# Altium PCB ice.PcbDoc (part 1 of 2)
Units mm, origin at the board's own origin, x right, y up, seen from the top; angles counter-clockwise.
Board outline 65 x 30 mm, 4 copper layers (L1 [TOP], L2 [GND], L3[PWR], L4 [BOTTOM]), stack 1.49 mm thick; 140 components, 110 nets, 478 pads, 226 vias.
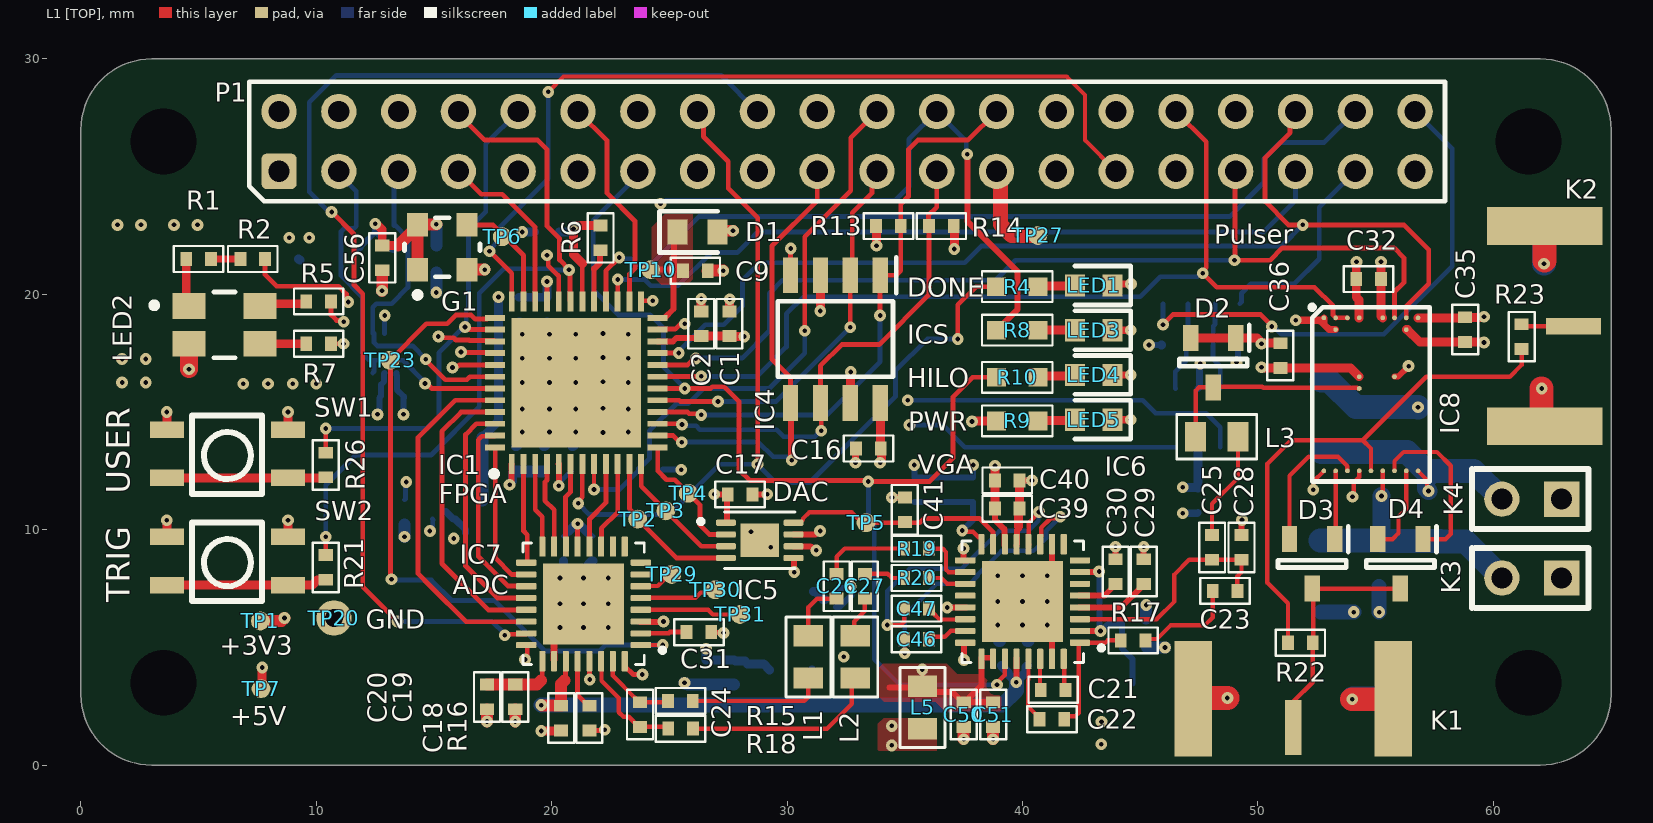
[diagram p0: L1 [TOP] view]
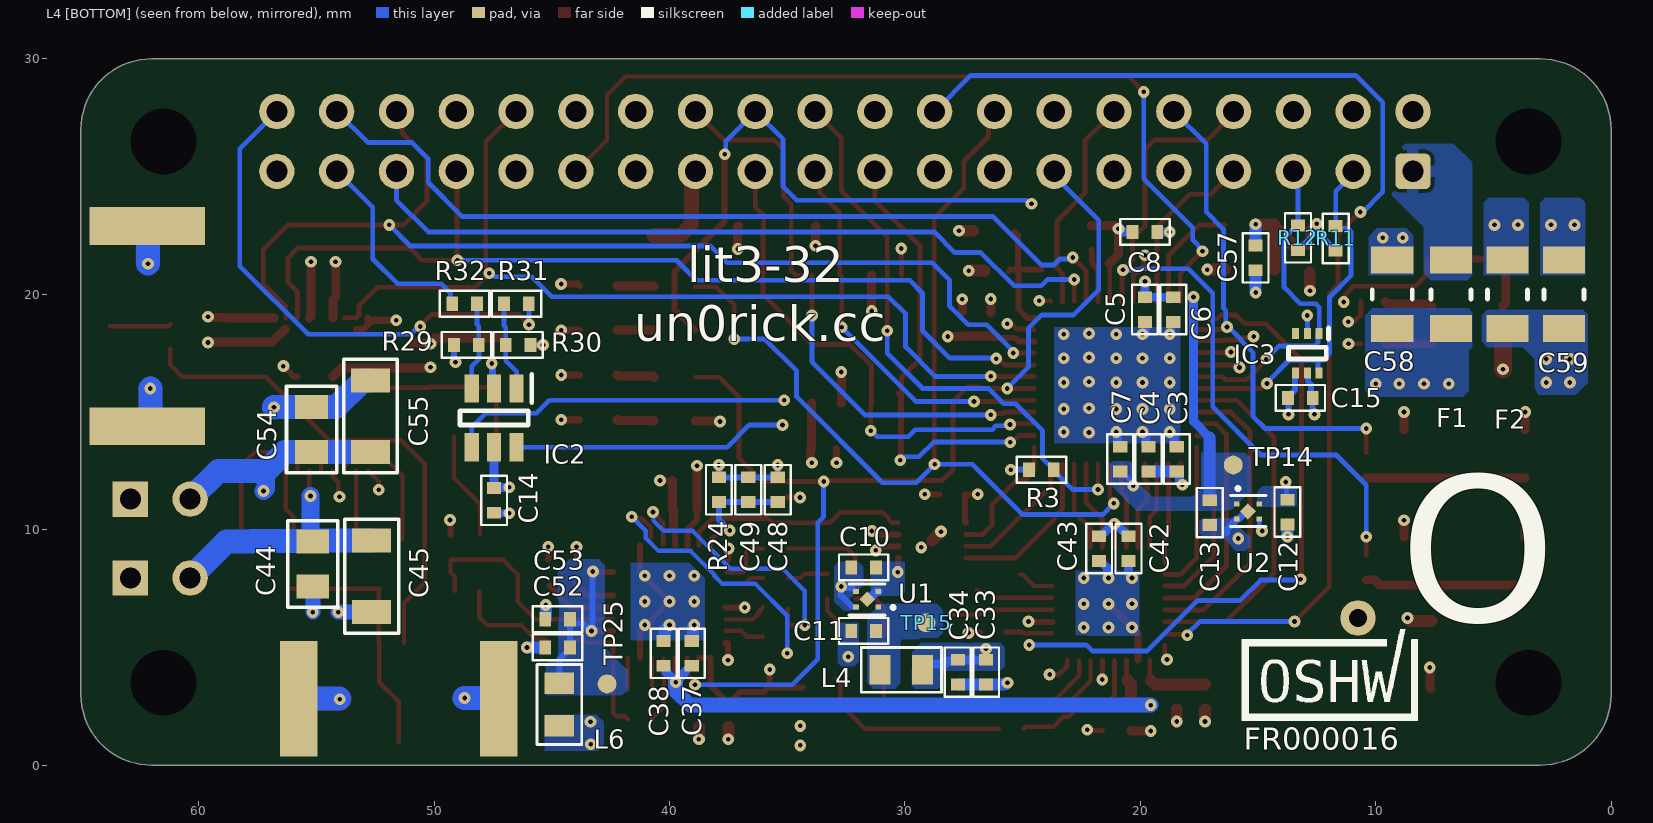
[diagram p1: L4 [BOTTOM] view, seen from below]
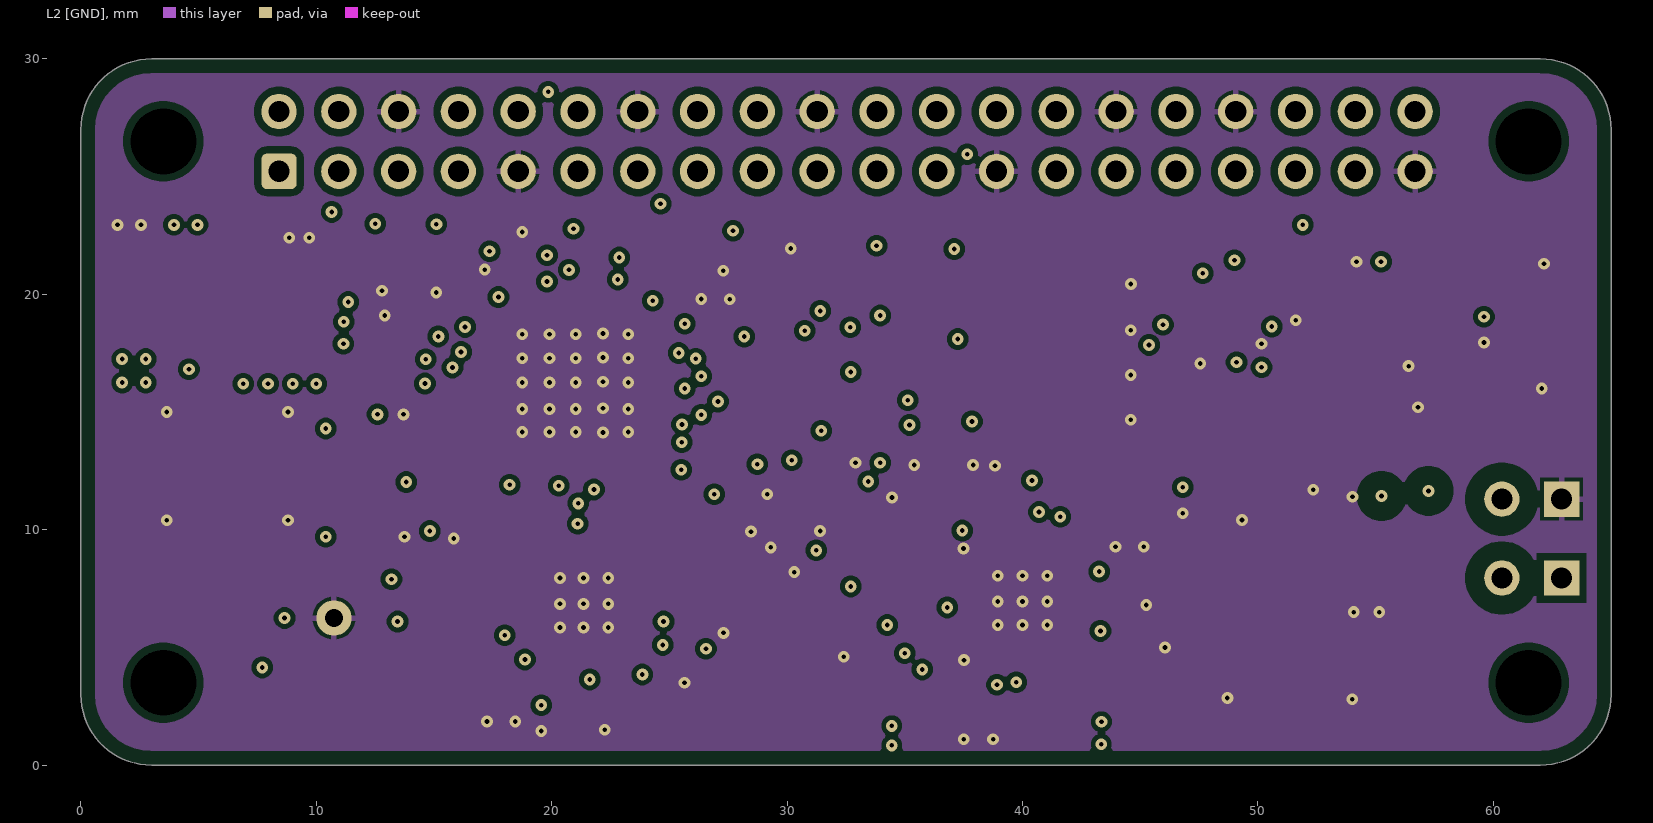
[diagram p2: L2 [GND]]
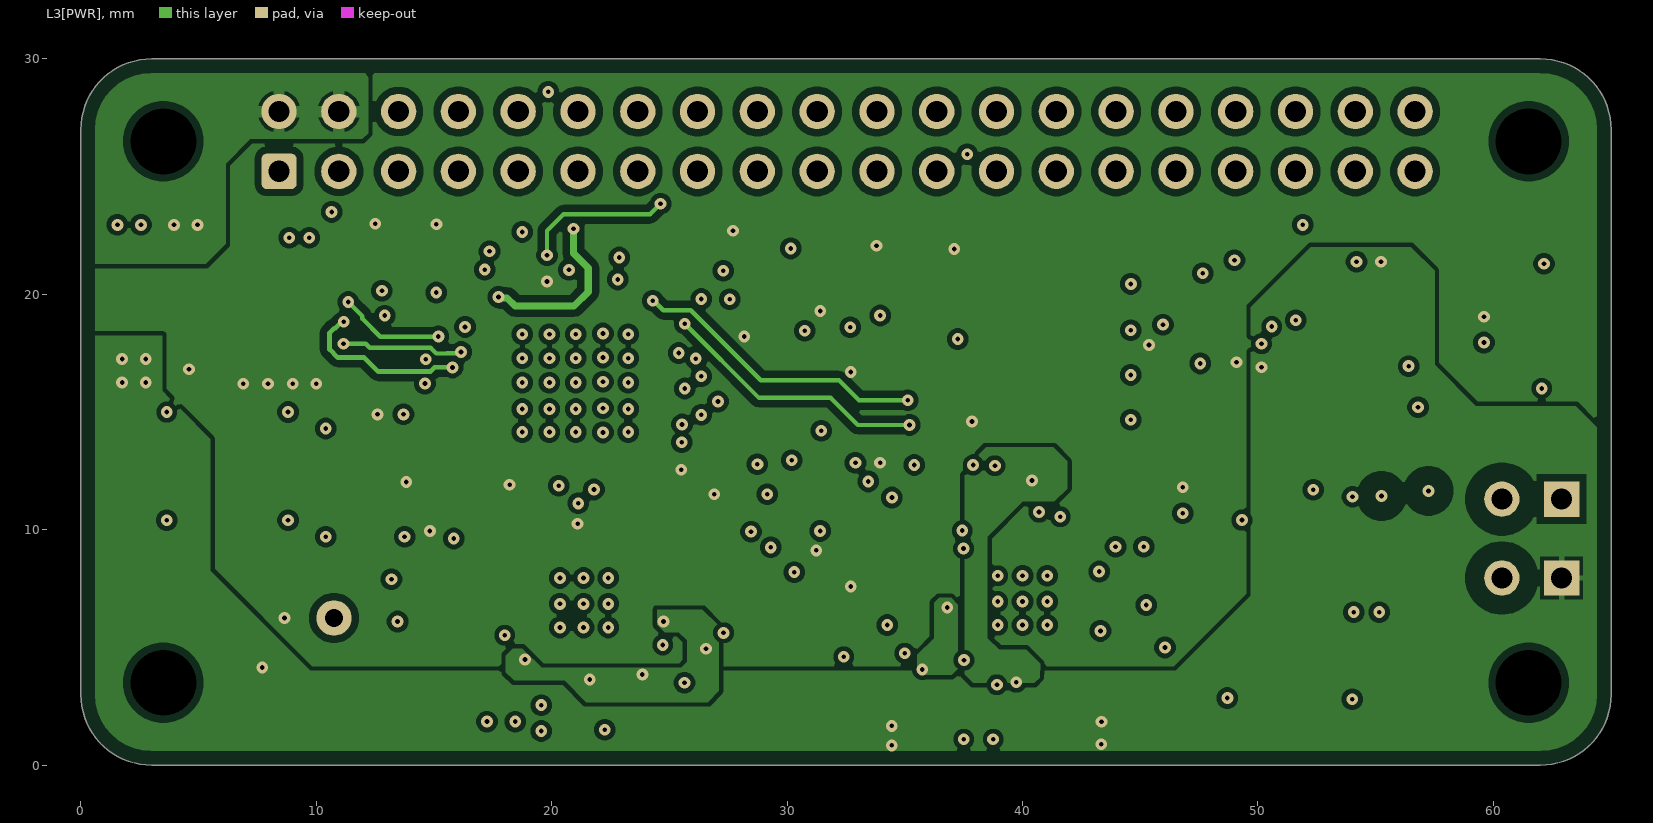
[diagram p3: L3[PWR]]
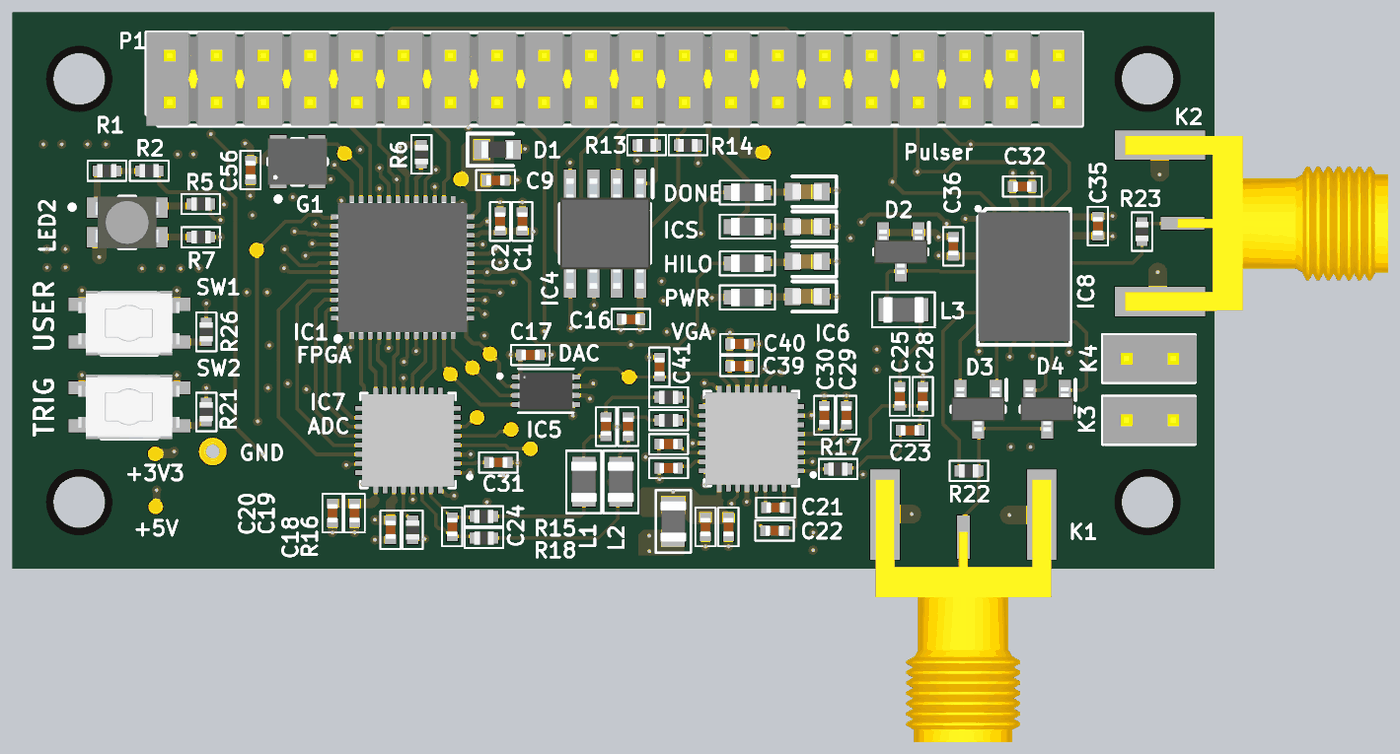
[diagram p5: 3D render of the assembled board from above, using the file's embedded part models]
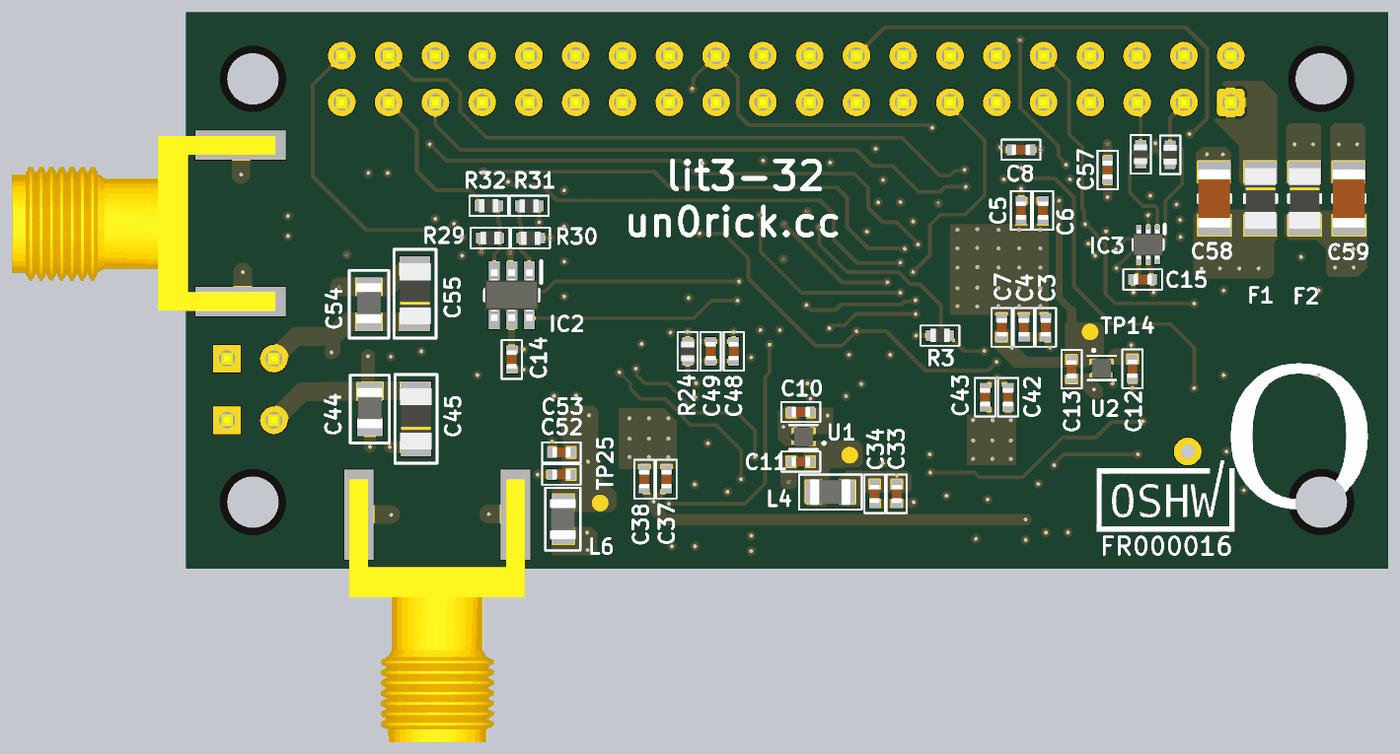
[diagram p6: 3D render of the assembled board from below, using the file's embedded part models]

## Layer stack, top to bottom
Top Solder: solder mask 0.0102, Solder Resist, Dk 3.5
L1 [TOP]: signal copper 0.035
Dielectric 2: prepreg 0.11, PP-018, Dk 4.29
L2 [GND]: signal copper 0.035
Dielectric 1: dielectric 1.13, FR-4, Dk 3.96
L3[PWR]: signal copper 0.035
Dielectric 3: prepreg 0.11, PP-018, Dk 4.29
L4 [BOTTOM]: signal copper 0.035
Bottom Solder: solder mask 0.0102, Solder Resist, Dk 3.5

## Board outline
0,3 0,27 cw(c3,27) 3,30 62,30 cw(c62,27) 65,27 65,3 cw(c62,3) 62,0 3,0 cw(c3,3)

## Design rules (kind name [scope] priority, off if disabled: settings)
BoardOutlineClearance [All] p1: gap=0.2 ignorepadtopadclearanceinfootprint=FALSE except(0.6: Poly-OutlineEdge)
Clearance Clearance_HV [InNet('+HV', '-HV')] p1: gap=0.6 ignorepadtopadclearanceinfootprint=TRUE
Clearance "Clearance Polygons" [InPolygon] p2: gap=0 ignorepadtopadclearanceinfootprint=FALSE except(0.2: Via-Fill Via-Poly Via-Region Fill-Fill Fill-Poly Fill-Region Poly-Poly Poly-Region Region-Region; 0.3: Arc-Fill Arc-Poly Arc-Region Track-Fill Track-Poly Track-Region SMDPad-Fill SMDPad-Poly SMDPad-Region THPad-Fill THPad-Poly THPad-Region)
Clearance [All] p3: gap=0.254 ignorepadtopadclearanceinfootprint=FALSE except(0.15: Arc-Text Track-Text SMDPad-Text THPad-Text Via-Text Fill-Text Poly-Text Region-Text Text-Text; 0.152: Arc-Arc Arc-Track Arc-SMDPad Arc-Via Track-Track Track-SMDPad Track-Via SMDPad-SMDPad SMDPad-Via; 0.2: Via-Fill Via-Poly Via-Region Fill-Fill Fill-Poly Fill-Region Poly-Poly Poly-Region Region-Region; 0.54: THPad-THPad)
ComponentClearance "HM-TRP & UFL" [InComponent('X1') vs InComponent('U1')] p1: gap=0 collisioncheckmode=3 verticalgap=0 showdistances=FALSE
ComponentClearance [All] p2: gap=0.025 collisioncheckmode=3 verticalgap=0.025 showdistances=FALSE
Height [All] p1: minheight=0 maxheight=60 prefheight=12.7
HoleSize [All] p1: absolutevalues=TRUE maxlimit=6.3 minlimit=0.2 maxpercent=80.000 minpercent=20.000
HoleToHoleClearance [All] p1: gap=0.54 allowstackedmicrovias=FALSE
MinimumAnnularRing MinimumAnnularRing_Via [IsVia] p1: minimumring=0.15
MinimumAnnularRing [All] p2: minimumring=0.3
MinimumSolderMaskSliver [All] p1: minsoldermaskwidth=0.1
PlaneClearance [All] p1: clearance=0.254
PlaneConnect [All] p1: planeconnectstyle=Relief reliefexpansion=0.102 reliefentries=4 reliefconductorwidth=0.152 reliefairgap=0.152
PolygonConnect "Via connect style" [isVia] p1: connectstyle=Direct reliefconductorwidth=0.254 reliefentries=4 polygonreliefangle="90 Angle" airgapwidth=0.254
PolygonConnect [All] p2: connectstyle=Relief reliefconductorwidth=0.254 reliefentries=4 polygonreliefangle="90 Angle" airgapwidth=0.152
RoutingCorners [All] p1: cornerstyle=45-Degree minsetback=1.25 maxsetback=1.25
RoutingVias [All] p1: holewidth=0.4 width=0.8 viastyle="Through Hole" minholewidth=0.2 minwidth=0.45 maxholewidth=2 maxwidth=4
SilkToSilkClearance [All] p1: silktosilkclearance=0
SilkToSolderMaskClearance [IsPad] p1: minsilkscreentomaskgap=0.127 clearancetoexposedcopper=TRUE
SolderMaskExpansion SolderMaskExpansion_Via [IsVia] p1: expansion=0.05 istentingtop=TRUE
SolderMaskExpansion [All] p2: expansion=0.05 istentingtop=FALSE useseparateexpansions=TRUE expansionbottom=0.05 istentingbottom=FALSE
UnRoutedNet [All] p1: checkbadconnections=TRUE
Width 50Ohm [InNetClass('50Ohm')] p1 off: maxlimit=0.185 minlimit=0.131 preferedwidth=0.185 toplayer_minwidth=0.185 midlayer1_maxwidth=0.131 midlayer1_prefwidth=0.131 midlayer2_maxwidth=0.131 midlayer2_prefwidth=0.131 bottomlayer_minwidth=0.185 impedanceprofiledriven=TRUE impedanceprofileid={AB148E26-7750-462C-8A86-80EFB9ABE8EF} impedanceprofilevalue=50.000000 minimp=50.000000 maximp=50.000000 favimp=50.000000
Width GND [InNet('GND')] p2: maxlimit=6.35 minlimit=0.127 preferedwidth=0.508
Width [All] p3: maxlimit=10.16 minlimit=0.152 preferedwidth=0.203
19 further rules are at their usual default settings.

## Classes and differential pairs
net class I2C: SCL SDA
net class PCM: PCM_CLK PCM_DIN PCM_FS
net class DAC_SPI: DAC_CS DAC_MOSI DAC_SCLK
net class FLASH_SPI: F_CS F_MISO F_MOSI F_SCLK
net class EA_CLK: EA_CLK
net class DCLK: DCLK
net class ADC_CLK: ADC_CLK
net class 50Ohm: NetC21_1 NetC21_2 NetC22_1 NetC22_2 NetC23_1 NetC23_2 NetC24_1 NetC24_2 NetC25_2 NetC26_1 NetC26_2 NetC27_1 NetC27_2 NetC46_1 NetC46_2 NetC47_1 NetC47_2 NetD2_3 NetD3_3 NetK2_1 NetL1_2 NetL2_2 VOH2 VOL2 XDCR
net class RCLK: RCLK

## Components (designator, comment, footprint, x,y, rotation, side; value= is the part's Value field where it differs from the comment)
C1 "cap0402" SM0402_3D_cap 27.55,18.75 r270 top value=100n
C2 "cap0402" SM0402_3D_cap 26.35,18.75 r270 top value=10u
C3 "cap0402" SM0402_3D_cap 18.45,13 r270 bottom value=100n
C4 "cap0402" SM0402_3D_cap 19.65,13 r270 bottom value=10u
C5 "cap0402" SM0402_3D_cap 19.8,19.35 r90 bottom value=100n
C6 "cap0402" SM0402_3D_cap 18.6,19.35 r90 bottom value=10u
C7 "cap0402" SM0402_3D_cap 20.85,13 r270 bottom value=100n
C8 "cap0402" SM0402_3D_cap 19.8,22.65 r0 bottom value=100n
C9 "cap0402" SM0402_3D_cap 26.1,21 r180 top value=100n
C10 "cap0402" SM0402_3D_cap 31.75,8.4 r0 bottom value=100n
C11 "cap0402" SM0402_3D_cap 31.75,5.7 r180 bottom value=1u
C12 "cap0402" SM0402_3D_cap 13.75,10.75 r90 bottom value=100n
C13 "cap0402" SM0402_3D_cap 17.05,10.725 r90 bottom value=1u
C14 "cap0402" SM0402_3D_cap 47.45,11.25 r90 bottom value=100n
C15 "cap0402" SM0402_3D_cap 13.2,15.6 r0 bottom value=100n
C16 "cap0402" SM0402_3D_cap 33.45,13.45 r180 top value=100n
C17 "cap0402" SM0402_3D_cap 28,11.5 r180 top value=100n
C18 "cap0402" SM0402_3D_cap 20.4,2 r270 top value=100n
C19 "cap0402" SM0402_3D_cap 18.45,2.9 r90 top value=100n
C20 "cap0402" SM0402_3D_cap 17.25,2.9 r90 top value=10u
C21 "cap0402" SM0402_3D_cap 41.3,3.2 r0 top value=100n
C22 "cap0402" SM0402_3D_cap 41.25,1.95 r180 top value=100n
C23 "cap0402" SM0402_3D_cap 48.6,7.4 r180 top value=18n
C24 "cap0402" SM0402_3D_cap 23.75,2.15 r90 top value=18p
C25 "cap0402" SM0402_3D_cap 48.05,9.25 r90 top value=100n
C26 "cap0402" SM0402_3D_cap 32.1,7.6 r90 top value=100n
C27 "cap0402" SM0402_3D_cap 33.3,7.6 r90 top value=100n
C28 "cap0402" SM0402_3D_cap 49.3,9.25 r90 top value=22p
C29 "cap0402" SM0402_3D_cap 45.15,8.225 r90 top value=100n
C30 "cap0402" SM0402_3D_cap 43.95,8.225 r90 top value=100n
C31 "cap0402" SM0402_3D_cap 26.25,5.65 r0 top value=100n
C32 "cap0402" SM0402_3D_cap 54.7,20.65 r180 top value=100n
C33 "cap0402" SM0402_3D_cap 26.55,3.95 r90 bottom value=100n
C34 "cap0402" SM0402_3D_cap 27.75,3.95 r90 bottom value=10u
C35 "cap0402" SM0402_3D_cap 58.8,18.5 r270 top value=100n
C36 "cap0402" SM0402_3D_cap 50.95,17.4 r270 top value=100n
C37 "cap0402" SM0402_3D_cap 39.05,4.75 r270 bottom value=100n
C38 "cap0402" SM0402_3D_cap 40.25,4.75 r270 bottom value=1n
C39 "cap0402" SM0402_3D_cap 39.349,10.895 r0 top value=100n
C40 "cap0402" SM0402_3D_cap 39.349,12.095 r0 top value=1n
C41 "cap0402" SM0402_3D_cap 35,10.85 r270 top value=1n
C42 "cap0402" SM0402_3D_cap 20.5,9.2 r90 bottom value=100n
C43 "cap0402" SM0402_3D_cap 21.75,9.2 r90 bottom value=10u
C44 "cap0805" SM0805 55.15,7.595 r90 bottom value=0.1x200V
C45 "cap1206" SM1206 52.65,6.5 r90 bottom value=0.1x200V
C46 "cap0402" SM0402_3D_cap 35.5,5.35 r0 top value=100n
C47 "cap0402" SM0402_3D_cap 35.5,6.65 r0 top value=100n
C48 "cap0402" SM0402_3D_cap 35.4,11.7 r270 bottom value=100n
C49 "cap0402" SM0402_3D_cap 36.65,11.7 r270 bottom value=1n
C50 "cap0402" SM0402_3D_cap 37.5,2.15 r90 top value=100n
C51 "cap0402" SM0402_3D_cap 38.75,2.15 r90 top value=1n
C52 "cap0402" SM0402_3D_cap 44.75,5 r180 bottom value=100n
C53 "cap0402" SM0402_3D_cap 44.75,6.2 r180 bottom value=1n
C54 "cap0805" SM0805 55.2,13.3 r90 bottom value=0.1x200V
C55 "cap1206" SM1206 52.7,13.3 r90 bottom value=0.1x200V
C56 "cap0402" SM0402_3D_cap 12.8,21.55 r90 top value=100n
C57 "cap0402" SM0402_3D_cap 15.1,21.55 r90 bottom value=10u
C58 "Capacitor" CAP_CERAMIC_1206 9.3,20 r270 bottom value=47uF
C59 "Capacitor" CAP_CERAMIC_1206 2,20 r270 bottom value=47uF
D1 "CDBU0520" DIOC1709X85N 26.2,22.65 r0 top
D2 "MMBD7000HS-7-F" SOT96P240X110-3N 48.1,17.1 r270 top
D3 "MMBD7000HS-7-F" SOT96P240X110-3N 52.3,8.55 r270 top
D4 "MMBD7000HS-7-F" SOT96P240X110-3N 56.05,8.55 r270 top
F1 "1206SFF050F/63-2" FUSE_1206 6.8,20 r270 bottom
F2 "1206SFF050F/63-2" FUSE_1206 4.4,20 r270 bottom
G1 "Oscillator" OSC_ASEM 15.35,22 r0 top
IC1 "ICE40UP5K-SG48ITR" QFN50P700X700X100-49N-D 21.05,16.25 r90 top
IC2 "SN74LVC2G17DBVR" SOT95P280X145-6N 47.45,14.75 r270 bottom
IC3 "TMP112AIDRLR" SOTFL50P160X60-6N 12.9,17.5 r270 bottom
IC4 "W25X10CLSNIG" SOIC127P600X175-8N 32.05,18.1 r270 top
IC5 "MCP4811-E/MC" SON50P200X300X100-9N 28.835,9.55 r0 top
IC6 "AD8332ACPZ-R7" QFN50P500X500X100-33N 40,6.95 r180 top
IC7 "AD9629BCPZ-65" QFN50P500X500X100-33N 21.35,6.85 r180 top
IC8 "HV7361GA-G" BGA22C50P9X14_500X700X105 54.8,15.75 r0 top
K1 "SMA_Edge" AMPHENOL_132357-11 51.5,1.25 r90 top
K2 "SMA_Edge" AMPHENOL_132357-11 63.75,18.65 r180 top
K3 "1x2PLS" JUMPER2 62.9,7.95 r270 top
K4 "1x2PLS" JUMPER2 62.9,11.3 r270 top
L1 "75R@100MHz" "SM_0805_INDUCTANCE _3D" 30.9,4.6 r270 top
L2 "75R@100MHz" "SM_0805_INDUCTANCE _3D" 32.9,4.6 r270 top
L3 "75R@100MHz" "SM_0805_INDUCTANCE _3D" 48.25,13.95 r0 top
L4 "75R@100MHz" "SM_0805_INDUCTANCE _3D" 30.15,4.05 r0 bottom
L5 "75R@100MHz" "SM_0805_INDUCTANCE _3D" 35.75,2.45 r270 top
L6 "75R@100MHz" "SM_0805_INDUCTANCE _3D" 44.675,2.575 r90 bottom
LED1 "HSMW-C191" LEDC1608X70N 43.025,20.375 r180 top
LED2 "CLVBA-FKA-CAEDH8BBB7A363" CLVBAFKACAEDH8BBB7A363 6.1,18.7 r0 top
LED3 "HSMW-C191" LEDC1608X70N 43.025,18.475 r180 top
LED4 "HSMW-C191" LEDC1608X70N 43.025,16.575 r180 top
LED5 "HSMW-C191" LEDC1608X70N 43.025,14.675 r180 top
P1 "2x20 2.54mm vertical" PLD-40 32.545,26.495 r0 top
R1 "100" SM0402_3D_res 5,21.5 r0 top value=4k7
R2 "100" SM0402_3D_res 7.3,21.5 r0 top value=4k7
R3 "10k" SM0402_3D_res 24.2,12.55 r180 bottom value=4k7
R4 "1k" SM0603_3D_res 39.775,20.325 r0 top value=4k7
R5 "100" SM0402_3D_res 10.1,19.7 r0 top value=4k7
R6 "100" SM0402_3D_res 22.075,22.4 r270 top value=4k7
R7 "100" SM0402_3D_res 10.1,17.9 r0 top value=4k7
R8 "1k" SM0603_3D_res 39.775,18.475 r0 top value=4k7
R9 "1k" SM0603_3D_res 39.775,14.625 r0 top value=4k7
R10 "1k" SM0603_3D_res 39.775,16.475 r0 top value=4k7
R11 "4k7" SM0402_3D_res 11.7,22.375 r90 bottom
R12 "4k7" SM0402_3D_res 13.3,22.4 r90 bottom
R13 "4k7" SM0402_3D_res 34.3,22.9 r180 top
R14 "4k7" SM0402_3D_res 36.55,22.9 r180 top
R15 "158" SM0402_3D_res 25.467,2.727 r180 top value=4k7
R16 "10k" SM0402_3D_res 21.6,2 r270 top value=4k7
R17 "280" SM0402_3D_res 44.7,5.3 r180 top value=4k7
R18 "158" SM0402_3D_res 25.475,1.55 r180 top value=4k7
R19 "84,5" SM0402_3D_res 35.5,9.2 r180 top value=4k7
R20 "84,5" SM0402_3D_res 35.5,7.95 r180 top value=4k7
R21 "100" SM0402_3D_res 10.4,8.4 r90 top value=4k7
R22 "0R" SM0402_3D_res 51.8,5.2 r180 top value=4k7
R23 "0R" SM0402_3D_res 61.2,18.2 r90 top value=4k7
R24 "11k" SM0402_3D_res 37.9,11.7 r270 bottom value=4k7
R26 "100" SM0402_3D_res 10.4,12.75 r90 top value=4k7
R29 "4k7" SM0402_3D_res 48.625,17.85 r180 bottom
R30 "4k7" SM0402_3D_res 46.425,17.85 r0 bottom
R31 "100" SM0402_3D_res 46.5,19.6 r0 bottom value=4k7
R32 "100" SM0402_3D_res 48.7,19.6 r180 bottom value=4k7
SW1 "EVQ-P9P02M" "Button 4.7x3.5 _SMT" 3.65,12.2 r90 top
SW2 "EVQ-P9P02M" "Button 4.7x3.5 _SMT" 3.65,7.65 r90 top
TP1 "TP80" TP80_no_silk 7.625,6.125 r0 top
TP2 "TP80" TP80_no_silk 23.65,10.45 r90 top
TP3 "TP80" TP80_no_silk 24.85,10.8 r90 top
TP4 "TP80" TP80_no_silk 25.8,11.55 r90 top
TP5 "TP80" TP80_no_silk 33.35,10.3 r90 top
TP6 "TP80" TP80_no_silk 17.9,22.45 r90 top
TP7 "TP80" TP80_no_silk 7.65,3.25 r90 top
TP10 "TP80" TP80_no_silk 24.2,21.05 r90 top
TP14 "TP80" TP80_no_silk 16.05,12.75 r270 bottom
TP15 "TP80" TP80_no_silk 29.1,6.05 r90 bottom
TP20 "TP125X75" TP125X75 10.75,6.25 r90 top
TP23 "TP80" TP80_no_silk 13.131,17.2 r90 top
TP25 "TP80" TP80_no_silk 42.65,3.45 r0 bottom
TP27 "TP80" TP80_no_silk 40.65,22.5 r90 top
TP29 "TP80" TP80_no_silk 25.1,8.1 r90 top locked
TP30 "TP80" TP80_no_silk 26.95,7.45 r90 top locked
TP31 "TP80" TP80_no_silk 28,6.4 r90 top
U1 "TLV70718PDQNR" "X2SON - 2" 31.601,7.046 r0 bottom
U2 "TLV70712PDQNR" "X2SON - 2" 15.425,10.775 r180 bottom

## Footprints (in the part's own frame and the unit in brackets; to place one, negate y for a bottom-side part, rotate by r counter-clockwise, add the part's x,y. Pads: shape width x height; smd on the part's side, far side on the other; paste and mask are expansions set on the pad)
AMPHENOL_132357-11 [mm]
  rect 2.35x0.7 smd: 1(0.35,0)
  rect 4.9x1.6 smd: 2(1.575,4.25) 2(1.575,-4.25)
  rect 4.9x1.6 smd far side: 2(1.575,4.25) 2(1.575,-4.25)
  body extent -10.8,-4.76 3.48,4.76, height 4.08
BGA22C50P9X14_500X700X105 [mm]
  round 0.2 smd: A1(-2,3.25) A2(-1.5,3.25) A3(-1,3.25) A4(-0.5,3.25) A6(0.5,3.25) A7(1,3.25) A8(1.5,3.25) A9(2,3.25) B2(-1.5,2.75) B8(1.5,2.75) F4(-0.5,0.75) F7(1,0.75) G4(-0.5,0.25) P1(-2,-3.25) P2(-1.5,-3.25) P3(-1,-3.25) P4(-0.5,-3.25) P5(0,-3.25) P6(0.5,-3.25) P7(1,-3.25) P8(1.5,-3.25) P9(2,-3.25)
  silkscreen extent -2.6,-3.7 2.5,3.8, body extent -2.5,-3.5 2.5,3.5, height 1.05
"Button 4.7x3.5 _SMT" [mm] "EVQ-P9P02M_SMT"
  rect 0.7x1.45 smd: 1(0,0) 2(0,-5.15) 3(2.05,0) 4(2.05,-5.15)
  silkscreen extent -0.67,-4.05 2.65,-1.07, body extent -0.72,-5.3 2.78,0.2, height 2.11
CAP_CERAMIC_1206 [mm]
  rect 1.15x1.8 smd mask+0.051: 1(-1.45,0) 2(1.45,0)
  silkscreen extent -0.2,-0.85 0.2,0.85, body extent -1.6,-0.9 1.6,0.9, height 1.61
CLVBAFKACAEDH8BBB7A363 [mm]
  rect 1.4x1.1 smd: 1(-1.5,0.8) 2(-1.5,-0.8) 3(1.5,0.8) 4(1.5,-0.8)
  silkscreen extent -3.11,-1.4 0.45,1.4, body extent -1.75,-1.4 1.75,1.4, height 2.06
DIOC1709X85N [mm]
  rect 0.85x1.05 smd: 1(-0.85,0) 2(0.85,0)
  silkscreen extent -1.63,-0.87 0.85,0.87, body extent -0.85,-0.45 0.85,0.45, height 0.85
FUSE_1206 [mm] "FUSE, 2-Leads, Body 3.2x1.60mm, IPC Medium Density"
  rect 1.15x1.8 smd mask+0.051: 1(-1.45,0) 2(1.45,0)
  silkscreen extent -0.2,-0.85 0.2,0.85, body extent -1.65,-0.85 1.65,0.85, height 0.61
JUMPER2 [mm]
  rect 1.5x1.5 hole 0.9: 1(0,0)
  round 1.5 hole 0.9: 2(0,-2.54)
  silkscreen extent -1.27,-3.81 1.27,1.14, body extent -1.27,-3.81 1.27,1.27, height 8.39
LEDC1608X70N [mm]
  rect 0.85x0.95 smd: 1(-0.8,0) 2(0.8,0)
  silkscreen extent -1.58,-0.82 0.8,0.82, body extent -0.8,-0.41 0.8,0.41, height 0.61
OSC_ASEM [mm]
  rect 0.9x1 smd mask+0.051: 1(-1.05,-0.95) 2(1.05,-0.95) 3(1.05,0.95) 4(-1.05,0.95)
  silkscreen extent -1.6,-2.15 1.6,1.25, body extent -1.6,-1.25 1.6,1.25, height 0.85
PLD-40 [mm]
  rrect30% 1.5x1.5 hole 0.9: 1(-24.13,-1.27)
  round 1.5 hole 0.9: 2(-24.13,1.27) 3(-21.59,-1.27) 4(-21.59,1.27) 5(-19.05,-1.27) 6(-19.05,1.27) 7(-16.51,-1.27) 8(-16.51,1.27) 9(-13.97,-1.27) 10(-13.97,1.27) 11(-11.43,-1.27) 12(-11.43,1.27) 13(-8.89,-1.27) 14(-8.89,1.27) 15(-6.35,-1.27) 16(-6.35,1.27) 17(-3.81,-1.27) 18(-3.81,1.27) 19(-1.27,-1.27) 20(-1.27,1.27) 21(1.27,-1.27) 22(1.27,1.27) 23(3.81,-1.27) 24(3.81,1.27) 25(6.35,-1.27) 26(6.35,1.27) 27(8.89,-1.27) 28(8.89,1.27) 29(11.43,-1.27) 30(11.43,1.27) 31(13.97,-1.27) 32(13.97,1.27) 33(16.51,-1.27) 34(16.51,1.27) 35(19.05,-1.27) 36(19.05,1.27) 37(21.59,-1.27) 38(21.59,1.27) 39(24.13,-1.27) 40(24.13,1.27)
  silkscreen extent -25.4,-2.54 25.4,2.54, body extent -25.4,-2.54 25.4,2.54, height 8.39
QFN50P500X500X100-33N [mm]
  rrect25% 0.86x0.26 smd: 1(-2.435,1.75) 2(-2.435,1.25) 3(-2.435,0.75) 4(-2.435,0.25) 5(-2.435,-0.25) 6(-2.435,-0.75) 7(-2.435,-1.25) 8(-2.435,-1.75) 17(2.435,-1.75) 18(2.435,-1.25) 19(2.435,-0.75) 20(2.435,-0.25) 21(2.435,0.25) 22(2.435,0.75) 23(2.435,1.25) 24(2.435,1.75)
  rrect25% 0.26x0.86 smd: 9(-1.75,-2.435) 10(-1.25,-2.435) 11(-0.75,-2.435) 12(-0.25,-2.435) 13(0.25,-2.435) 14(0.75,-2.435) 15(1.25,-2.435) 16(1.75,-2.435) 25(1.75,2.435) 26(1.25,2.435) 27(0.75,2.435) 28(0.25,2.435) 29(-0.25,2.435) 30(-0.75,2.435) 31(-1.25,2.435) 32(-1.75,2.435)
  rect 3.45x3.45 smd paste-3: 33(0,0)
  silkscreen extent -3.45,-2.58 2.58,2.58, body extent -2.52,-2.52 2.52,2.52, height 0.88
QFN50P700X700X100-49N-D [mm]
  rect 0.85x0.25 smd mask+0.025: 1(-3.45,2.75) 12(-3.45,-2.75) 25(3.45,-2.75) 36(3.45,2.75)
  rect 0.85x0.25 smd: 2(-3.45,2.25) 3(-3.45,1.75) 4(-3.45,1.25) 5(-3.45,0.75) 6(-3.45,0.25) 7(-3.45,-0.25) 8(-3.45,-0.75) 9(-3.45,-1.25) 10(-3.45,-1.75) 11(-3.45,-2.25) 26(3.45,-2.25) 27(3.45,-1.75) 28(3.45,-1.25) 29(3.45,-0.75) 30(3.45,-0.25) 31(3.45,0.25) 32(3.45,0.75) 33(3.45,1.25) 34(3.45,1.75) 35(3.45,2.25)
  rect 0.25x0.85 smd mask+0.025: 13(-2.75,-3.45) 24(2.75,-3.45) 37(2.75,3.45) 48(-2.75,3.45)
  rect 0.25x0.85 smd: 14(-2.25,-3.45) 15(-1.75,-3.45) 16(-1.25,-3.45) 17(-0.75,-3.45) 18(-0.25,-3.45) 19(0.25,-3.45) 20(0.75,-3.45) 21(1.25,-3.45) 22(1.75,-3.45) 23(2.25,-3.45) 38(2.25,3.45) 39(1.75,3.45) 40(1.25,3.45) 41(0.75,3.45) 42(0.25,3.45) 43(-0.25,3.45) 44(-0.75,3.45) 45(-1.25,3.45) 46(-1.75,3.45) 47(-2.25,3.45)
  rect 5.5x5.5 smd: 49(0,0)
  silkscreen extent -4,3.37 -3.75,3.62, body extent -3.55,-3.55 3.55,3.55, height 1
SM0402_3D_cap [mm] "0402 cap"
  rect 0.5x0.6 smd: 1(-0.525,0) 2(0.525,0)
  silkscreen extent -1.05,-0.55 1.05,0.55, body extent -0.5,-0.27 0.5,0.28, height 0.51
SM0402_3D_res [mm] "0603 inch resistor"
  rect 0.5x0.6 smd: 1(-0.525,0) 2(0.525,0)
  silkscreen extent -1.05,-0.55 1.05,0.55, body extent -0.52,-0.35 0.53,0.36, height 0.51
SM0603_3D_res [mm] "0603 inch resistor"
  rect 0.8x0.8 smd: 1(-0.875,0) 2(0.875,0)
  silkscreen extent -1.5,-0.65 1.5,0.65, body extent -0.87,-0.47 0.88,0.48, height 0.55
SM0805 [mil]
  rect 40x55 smd: 1(0,0) 2(75,0)
  silkscreen extent -35,-42 110,42, body extent -3,-28 83,28, height 43
SM1206 [mil]
  rect 40x65 smd: 1(0,0) 2(120,0)
  silkscreen extent -35,-45 155,45, body extent -5,-34 125,34, height 24
"SM_0805_INDUCTANCE _3D" [mm] "chip inductanse 0805 inch"
  rect 0.9x1.25 smd: 1(-0.9,0) 2(0.9,0)
  silkscreen extent -1.7,-0.95 1.7,0.95, body extent -1.1,-0.7 1.1,0.7, height 1.1
SOIC127P600X175-8N [mm]
  rect 1.525x0.65 smd: 1(-2.712,1.905) 2(-2.712,0.635) 3(-2.712,-0.635) 4(-2.712,-1.905) 5(2.712,-1.905) 6(2.712,-0.635) 7(2.712,0.635) 8(2.712,1.905)
  silkscreen extent -3.47,-2.45 1.6,2.58, body extent -3,-2.45 3,2.45, height 1.75
SON50P200X300X100-9N [mm]
  rrect50% 0.84x0.27 smd: 1(-1.435,0.75) 2(-1.435,0.25) 3(-1.435,-0.25) 4(-1.435,-0.75) 5(1.435,-0.75) 6(1.435,-0.25) 7(1.435,0.25) 8(1.435,0.75)
  rect 1.625x1.425 smd paste-2: 9(0,0)
  silkscreen extent -2.6,-1.2 1.5,1.2, body extent -1.5,-1.01 1.5,1, height 0.94
SOT95P280X145-6N [mm]
  rect 1.2x0.6 smd: 1(-1.25,0.95) 2(-1.25,0) 3(-1.25,-0.95) 4(1.25,-0.95) 5(1.25,0) 6(1.25,0.95)
  silkscreen extent -1.85,-1.45 0.3,1.6, body extent -1.4,-1.45 1.4,1.45, height 1.45
SOT96P240X110-3N [mm]
  rect 1.1x0.65 smd: 1(-1.05,0.96) 2(-1.05,-0.96) 3(1.05,0)
  silkscreen extent -1.6,-1.45 0.15,1.54, body extent -1.2,-1.45 1.2,1.45, height 1.1
SOTFL50P160X60-6N [mm]
  rect 0.475x0.3 smd: 1(-0.838,0.5) 2(-0.838,0) 3(-0.838,-0.5) 4(0.838,-0.5) 5(0.838,0) 6(0.838,0.5)
  silkscreen extent -1.07,-0.8 0.25,0.9, body extent -0.8,-0.8 0.8,0.8, height 0.6
TP80_no_silk [mm]
  round 0.8 smd paste-10 mask+0.051: 1(0,0)
TP125X75 [mm]
  round 1.5 hole 0.75: 1(0,0)
"X2SON - 2" [mm] "DQN, X2SON"
  rect 0.24x0.21 smd paste+0 mask+0.08: 1(-0.475,0.325) 2(-0.475,-0.325) 3(0.475,-0.325) 4(0.475,0.325)
  rect 0.48x0.48 smd rot 45 mask+0.075: 5(0,0)
  silkscreen extent -1.17,-0.65 0.78,0.68, body extent -0.5,-0.5 0.5,0.5, height 0.37

## Part data
C1 C2 C3 C4 C5 C6 C7 C8 C9 C10 C11 C12 C13 C14 C15 C16 C17 C18 C19 C20 C21 C22 C23 C24 C25 C26 C27 C28 C29 C30 C31 C32 C33 C34 C35 C36 C37 C38 C39 C40 C41 C42 C43 C46 C47 C48 C49 C50 C51 C52 C53 C56 C57: "Capacitor  0402 inch", LatestRevisionDate=17-Jul-2002, LatestRevisionNote="Re-released for DXP Platform.", PackageDescription="Radial Cap, Thru-Hole; 2 Leads; 0.3 in Pin Spacing", PackageReference=RAD-0.3, Published=8-Jun-2000, Publisher="Altium Limited"
C44 C45 C54 C55: "Capacitor", LatestRevisionDate=17-Jul-2002, LatestRevisionNote="Re-released for DXP Platform.", PackageDescription="Radial Cap, Thru-Hole; 2 Leads; 0.3 in Pin Spacing", PackageReference=RAD-0.3, Published=8-Jun-2000, Publisher="Altium Limited"
C58 C59: "CAP CER 47UF 25V X5R 1206", ATT Capacitor Type=Ceramic, ATT Case="1206 (3216 Metric)", ATT Lifetime @ Temp=-, ATT Operating Temperature="-25°C ~ 85°C", ATT Temperature Coefficient=JB, ATT Tolerance=±20%, ATT Working Voltage=25V, DigikeyPartNumber=445-11717-1-ND, ManufacturerPartNumber=C3216JB1E476M160AC, HelpURL=https://product.tdk.com/info/en/documents/chara_sheet/C3216JB1E476M160AC.pdf?ref_disty=digikey, PhotoURI=https://media.digikey.com/Renders/Murata%20Renders/1206-(3216-Metric)-1,80mm.jpg, RoHS=Compliant, Technology=SMT, Validation Status=Verified
D1: "Schottky Diode", Manufacturer_Name="Comchip Technology", Mouser Part Number=750-CDBU0520, Arrow Part Number=CDBU0520, Arrow Price/Stock=https://www.arrow.com/en/products/cdbu0520/comchip-technology, Datasheet Link=http://www.comchiptech.com/admin/files/product/CDBU0520-HF-RevA797161.pdf, Height=0.85mm, Manufacturer_Part_Number=CDBU0520, Mouser Price/Stock=https://www.mouser.co.uk/ProductDetail/Comchip-Technology/CDBU0520/?qs=QrYNfmA0esYvGSGDalbccA%3D%3D
D2 D3 D4: "Diode", Manufacturer_Name="Diodes Inc.", Mouser Part Number=621-MMBD7000HS-7-F, Arrow Part Number=MMBD7000HS-7-F, Arrow Price/Stock=https://www.arrow.com/en/products/mmbd7000hs-7-f/diodes-incorporated, Datasheet Link=https://www.diodes.com/assets/Datasheets/ds31782.pdf, Height=1.1mm, Manufacturer_Part_Number=MMBD7000HS-7-F, Mouser Price/Stock=https://www.mouser.co.uk/ProductDetail/Diodes-Incorporated/MMBD7000HS-7-F/?qs=4YT44p7w2bs7ic313M4gfA%3D%3D
F1 F2: "500mA AC 63V DC Fuse Board Mount Surface Mount 1206", ATT Current Rating (Amps)=500mA, ATT Operating Temperature="-55°C ~ 125°C", ATT Voltage Rating DC=63V, DigikeyPartNumber=1206SFF050F/63-2CT-ND, ATT Fuse size=1206, ATT Technology=SMD, HelpURL=https://www.littelfuse.com/~/media/electronics/datasheets/fuses/littelfuse_fuse_sfs_datasheet.pdf.pdf, ManufacturerPartNumber=1206SFF050F/63-2, photoURL=https://media.digikey.com/photos/Tyco%20Raychem%20Photos/1206SFF%20SERIES.jpg
G1: "OSC MEMS 80 MHZ SMD", ATT Frequency=80Mhz, ATT Frequency Stability=±10ppm, ATT Operating Temperature="-40°C ~ 85°C", ATT Package / Case="4-SMD, No Lead (DFN, LCC)", ATT Supply Current=16mA, ATT Supply Voltage="1.7 V ~ 3.6 V", Supplier Part Number 1=535-11082-1-ND, ATT Series="ASEMB, Pure Silicon™", ATT Type="MEMS (Silicon)", HelpURL=https://www.mouser.ca/datasheet/2/3/ASEMB-7474.pdf, PhotoURI=http://media.digikey.com/Photos/Abracon%20Corporation%20Photos/ASEMB3.2-SERIES.jpg, RoHS=Compliant, Supplier 1=Digi-Key, Technology=SMT, Validation Status=Verified
IC1: "Integrated Circuit", Manufacturer_Name="Lattice Semiconductor", Mouser Part Number=842-40UP5KSG48ITR, Arrow Part Number=ICE40UP5K-SG48ITR, Arrow Price/Stock=https://www.arrow.com/en/products/ice40up5k-sg48itr/lattice-semiconductor, Datasheet Link=https://www.arrow.com/en/products/ice40up5k-sg48itr/lattice-semiconductor, Height=1mm, Manufacturer_Part_Number=ICE40UP5K-SG48ITR, Mouser Price/Stock=https://www.mouser.com/Search/Refine.aspx?Keyword=842-40UP5KSG48ITR
IC2: "Integrated Circuit", Manufacturer_Name="Texas Instruments", Mouser Part Number=595-SN74LVC2G17DBVR, Arrow Part Number=SN74LVC2G17DBVR, Arrow Price/Stock=https://www.arrow.com/en/products/sn74lvc2g17dbvr/texas-instruments, Datasheet Link=http://www.ti.com/lit/gpn/sn74lvc2g17, Height=1.45mm, Manufacturer_Part_Number=SN74LVC2G17DBVR, Mouser Price/Stock=https://www.mouser.co.uk/ProductDetail/Texas-Instruments/SN74LVC2G17DBVR/?qs=X1HXWTtiZ0RnstCufGEJxQ%3D%3D
IC3: "Integrated Circuit", Manufacturer_Name="Texas Instruments", Mouser Part Number=595-TMP112AIDRLR, Arrow Part Number=TMP112AIDRLR, Arrow Price/Stock=https://www.arrow.com/en/products/tmp112aidrlr/texas-instruments, Datasheet Link=http://www.ti.com/general/docs/suppproductinfo.tsp?distId=10&gotoUrl=http%3A%2F%2Fwww.ti.com%2Flit%2Fgpn%2Ftmp112, Height=0.6mm, Manufacturer_Part_Number=TMP112AIDRLR, Mouser Price/Stock=https://www.mouser.co.uk/ProductDetail/Texas-Instruments/TMP112AIDRLR/?qs=62Z1lCHpKYghtK4%2FJn2ysA%3D%3D
IC4: "Integrated Circuit", Manufacturer_Name=Winbond, Mouser Part Number=454-W25X10CLSNIG, Arrow Part Number=W25X10CLSNIG, Arrow Price/Stock=https://www.arrow.com/en/products/w25x10clsnig/winbond-electronics, Datasheet Link=https://www.arrow.com/en/products/w25x10clsnig/winbond-electronics, Height=1.75mm, Manufacturer_Part_Number=W25X10CLSNIG, Mouser Price/Stock=https://www.mouser.co.uk/ProductDetail/Winbond/W25X10CLSNIG?qs=qSfuJ%252Bfl%2Fd58%252Bc3wxS8Vmg%3D%3D
IC5: "DAC 1-CH Resistor-String 10-bit Automotive 8-Pin DFN EP Tube", Case/Package=DFN, Input Offset Voltage (Vos)=820uV, Manufacturer=Microchip, Max Operating Temperature=125°C, Max Supply Voltage=5.5V, Min Operating Temperature=-40°C, Min Supply Voltage=2.7V, Nominal Supply Current=330uA, Operating Supply Voltage=5V, Package Quantity=150, Supplier Part Number 1=MCP4811-E/MC-ND, ComponentLink1Description=datasheet, ComponentLink1URL=https://datasheet.ciiva.com/26922/getdatasheetpartid-765518-26922591.pdf?src-supplier=Verical, Full Scale Error=3.5LSB, Height=0.95mm, Integral Nonlinearity (INL)=3.5LSB, Interface=SPI,Serial,3-WIRE, Lead Free="Lead Free", Length=2mm, ManufacturerPartNumber=MCP4811-E/MC, Mount="Surface Mount", Number of Bits=10, Number of Channels=1, Number of Converters=1, Number of DAC Channels=1, Number of Pins=8, Output Polarity=Bipolar, Output Type=Voltage, Packaging=Rail/Tube, Polarity=Bipolar, Radiation Hardening=No, REACH SVHC="No SVHC", Resolution=10b, RoHS=Yes, Settling Time=4.5us, Supplier 1=Digi-Key, Supply Current=330uA, Width=3mm
IC6: "Integrated Circuit", Manufacturer_Name="Analog Devices", Mouser Part Number=584-AD8332ACPZ-R7, Arrow Part Number=AD8332ACPZ-R7, Arrow Price/Stock=https://www.arrow.com/en/products/ad8332acpz-r7/analog-devices, Manufacturer_Part_Number=AD8332ACPZ-R7, Mouser Price/Stock=https://www.mouser.co.uk/ProductDetail/Analog-Devices/AD8332ACPZ-R7?qs=%2FtpEQrCGXCzEVqYW%252BWJwOA%3D%3D
IC7: "Integrated Circuit", Manufacturer_Name="Analog Devices", Mouser Part Number=584-AD9629BCPZ-65, Arrow Part Number=AD9629BCPZ-65, Arrow Price/Stock=https://www.arrow.com/en/products/ad9629bcpz-65/analog-devices, Manufacturer_Part_Number=AD9629BCPZ-65, Mouser Price/Stock=https://www.mouser.co.uk/ProductDetail/Analog-Devices/AD9629BCPZ-65?qs=BpaRKvA4VqGjvk9AFyB3jg%3D%3D
IC8: "Integrated Circuit", Manufacturer_Name=Microchip, Mouser Part Number=579-HV7361GA-G, Arrow Part Number=HV7361GA-G, Arrow Price/Stock=https://www.arrow.com/en/products/hv7361ga-g/microchip-technology, Datasheet Link=http://ww1.microchip.com/downloads/en/DeviceDoc/20005570C.pdf, Height=1.05mm, Manufacturer_Part_Number=HV7361GA-G, Mouser Price/Stock=https://www.mouser.co.uk/ProductDetail/Microchip-Technology/HV7361GA-G?qs=NoqMqJKvPFJ98Yl1cb744A%3D%3D
L1 L2: "chip inductance", Case=0805, Manufacturer=MURATA, Manufacturer Part Number=AIML-0805HC-1R5M-T, Part Number=IND0805_MURATA_BLM21BB750SN1D, Power=700mA, Resistance=0.16R, Supplier Part Number 1=535-12788-1-ND, Tolerance=±25%, Author="S. Jafar", Component Type=Standard, ComponentHeight=1.05mm, CreateDate=12/21/2015, LatestRevisionDate=12/21/2015, Mounted=Yes, Part Description="SMD EMIFIL Suppression Chip Ferrite Bead", Pin Count=2, SMD=Yes, Socket=No, Status=None, Supplier 1=Digi-Key, Table="Inductors SMD"
L3 L4 L5 L6: "Ferrite Beads Multi-Layer 600Ohm 25% 100MHz 1A 0.2Ohm DCR 0603 T/R", Case=0805, Case/Package=0603, Manufacturer=MURATA, Manufacturer Part Number=BLM21BB750SN1D, ManufacturerPartNumber=PBY160808T-601Y-N, Part Number=IND0805_MURATA_BLM21BB750SN1D, Power=700mA, Resistance=0.16R, Supplier Part Number 1=13-PBY160808T-601Y-NCT-ND, Tolerance=±25%, Author="S. Jafar", Component Type=Standard, ComponentHeight=1.05mm, ComponentLink1Description=http://components.arrow.com/part/dataview/0323_06472368?src-supplier=Arrow+Europe, ComponentLink1URL=http://components.arrow.com/part/dataview/0323_06472368?src-supplier=Arrow+Europe, CreateDate=12/21/2015, LatestRevisionDate=12/21/2015, Mounted=Yes, Part Description="SMD EMIFIL Suppression Chip Ferrite Bead", Pin Count=2, RoHS=Yes, RoHS Compliant=Yes, SMD=Yes, Socket=No, Status=None, Supplier 1=Digi-Key, Table="Inductors SMD"
LED1 LED3 LED4 LED5: "LED", Manufacturer_Name="Avago Technologies", Mouser Part Number=630-HSMW-C191, Datasheet Link=https://docs.broadcom.com/docs/AV02-0186EN, Height=0.7mm, Manufacturer_Part_Number=HSMW-C191, Mouser Price/Stock=https://www.mouser.com/Search/Refine.aspx?Keyword=630-HSMW-C191
LED2: "LED", Manufacturer_Name=Cree, Mouser Part Number=941-VBAFKACAEDH8B7A3, Arrow Part Number=CLVBA-FKA-CAEDH8BBB7A363, Arrow Price/Stock=https://www.arrow.com/en/products/clvba-fka-caedh8bbb7a363/cree, Datasheet Link=http://www.cree.com/led-components/media/documents/ds-CLVBA-FKA.pdf, Height=2.1mm, Manufacturer_Part_Number=CLVBA-FKA-CAEDH8BBB7A363, Mouser Price/Stock=https://www.mouser.co.uk/ProductDetail/Cree-Inc/CLVBA-FKA-CAEDH8BBB7a363/?qs=3AcK5DacLboXYkg4biCgSA%3D%3D
P1: "Header, 40-Pin", LatestRevisionDate=17-Jul-2002, LatestRevisionNote="Re-released for DXP Platform.", Publisher="Altium Limited"
R1 R2 R3 R5 R6 R7 R11 R12 R13 R14 R15 R16 R17 R18 R19 R20 R21 R22 R23 R24 R26 R29 R30 R31 R32: "Res_0402_EU", Case=1206, Manufacturer=GENERIC, Manufacturer1 ComponentHeight=0.65mm, Manufacturer1 Example="NIC COMPONENT", Manufacturer1 Part Number=NRC12F4701TRF, Manufacturer Part Number=R1206_4K7_1%_0.25W_100PPM, Power=0.25W, Tolerance=±1%, Author="CERN DEM JLC", Component Type=Standard, CreateDate=12/3/2007, HelpURL=\\cern.ch\dfs\Applications\Altium\Datasheets\R1206_NIC_NRC.pdf, LatestRevisionDate=3/13/2008, Mounted=Yes, Part Description="General Purpose Thick Film Chip Resistor", Part Number=R1206_4K7_1%_0.25W_100PPM, Pin Count=2, SMD=Yes, Socket=No, Status=Preferred, Table="Resistors SMD", TC=±100ppm/°C
R4 R8 R9 R10: "Res_0603_EU", Case=1206, Manufacturer=GENERIC, Manufacturer1 ComponentHeight=0.65mm, Manufacturer1 Example="NIC COMPONENT", Manufacturer1 Part Number=NRC12F4701TRF, Manufacturer Part Number=R1206_4K7_1%_0.25W_100PPM, Power=0.25W, Tolerance=±1%, Author="CERN DEM JLC", Component Type=Standard, CreateDate=12/3/2007, HelpURL=\\cern.ch\dfs\Applications\Altium\Datasheets\R1206_NIC_NRC.pdf, LatestRevisionDate=3/13/2008, Mounted=Yes, Part Description="General Purpose Thick Film Chip Resistor", Part Number=R1206_4K7_1%_0.25W_100PPM, Pin Count=2, SMD=Yes, Socket=No, Status=Preferred, Table="Resistors SMD", TC=±100ppm/°C
SW1 SW2: library part "Button 4.7x3.5 SMT"
U1 U2: "low drop LDO"

## Free pads (board coordinates)
  round 0 hole 2.8 unplated mask+1.8: 0(3.5,3.5) 0(3.5,26.5) 0(61.5,3.5) 0(61.5,26.5)

## Via types
v1: diameter 0.5, hole 0.2, L1 [TOP] to L4 [BOTTOM], tented both sides, 226 vias

## Nets (pads, with @x,y where several pads share a name; then routed paths per layer and width w, separated by ;. In a path a pad name is that pad's centre, name@x,y a point inside that pad or via, vN(x,y) a via of type N, cw(c..) or ccw(c..) an arc to the next point about the centre after c; other vN are vias at no path point)
0V9: C18.1 C37.2 C38.2 C39.2 C40.2 IC6.13 IC6.28 IC7.27 | length 30
  L1 [TOP] w0.203: 20.546,3.6 20.588,3.642 IC7.27@20.588,4.462
  L1 [TOP] w0.254: v1(19.55,2.55) v1@19.575,2.525 ; v1(39.736,3.517) 39.747,3.528 39.747,4.56 IC6.28@39.748,4.561 ; IC6.13@39.746,9.338 39.771,9.363 39.771,9.984 39.874,10.087 ; C40.2@39.874,12.095 v1(40.399,12.095)
  L1 [TOP] w0.381: 39.833,10.128 39.833,10.854 C39.2@39.874,10.895 C40.2@39.874,12.095
  L1 [TOP] w0.508: v1@19.575,2.525 C18.1@20.4,2.525 20.4,3.454 20.546,3.6
  L4 [BOTTOM] w0.254: C37.2@39.05,4.225 C37.2@39.1,4.225 ; C38.2@40.2,4.225 C38.2@40.25,4.225
  L4 [BOTTOM] w0.381: C37.2@39.1,4.225 39.378,3.946 39.378,3.885 39.747,3.517 39.747,3.559 40.14,3.953 40.14,4.165 C38.2@40.2,4.225
  L4 [BOTTOM] w0.635: v1(19.55,2.55) 39.122,2.55 39.747,3.175 39.736,3.185 v1(39.736,3.517)
5VLNA: C52.2 C53.2 IC6.2 IC6.7 L6.2 TP25.1 | length 8.3
  L1 [TOP] w0.254: IC6.2@42.388,5.703 42.39,5.7 v1@43.309,5.7 ; IC6.7@42.388,8.195 43.145,8.195 43.175,8.225 v1(43.252,8.225)
  L4 [BOTTOM] w0.254: v1(43.252,8.225) 43.276,8.201 43.276,5.735 v1(43.31,5.701) ; v1@43.31,5.736 43.376,5.736 43.602,5.962 43.617,5.962 43.683,6.027 44.102,6.027 C53.2@44.225,6.15 ; C53.2@44.225,6.2 C53.2@44.225,6.15 ; L6.2@44.675,3.475 44.675,4.5 44.225,4.95 C52.2@44.225,5 44.225,6.027 C53.2@44.225,6.15
5VVGA: C50.2 C51.2 IC6.21 IC6.25 IC6.26 L5.1 | length 8.9
  L1 [TOP] w0.254: 34.35,3.3 35.7,3.3 L5.1@35.75,3.35 ; v1@35.75,4.02 L5.1@35.75,3.35 ; v1(36.8,6.7) 37.608,6.7 IC6.21@37.612,6.696 ; C51.2@38.75,2.675 C50.2@37.55,2.675 ; IC6.26@38.753,4.56 38.755,4.562 38.247,4.562 38.247,3.373 C50.2@37.55,2.675 ; L5.1@35.75,3.35 36,3.1 37.025,3.1 37.45,2.675 C50.2@37.5,2.675 C50.2@37.55,2.675
  other v1: 35.74,4.063
+1V2: C7.2 C8.2 C13.2 IC1.5 IC1.30 R6.1 TP14.1 U2.1 | length 23
  L1 [TOP] w0.203: IC1.5@20.293,12.793 IC1.5@20.3,12.8 ; IC1.30@21.3,19.7 21.3,21.312
  L1 [TOP] w0.254: IC1.5@20.293,12.793 20.299,12.788 v1(20.299,11.873)
  L1 [TOP] w0.381: 21.3,21.312 20.918,21.694 20.923,21.699 v1(20.923,22.788) 20.944,22.788 21.081,22.925 R6.1@22.075,22.925
  L3[PWR] w0.305: v1(17.737,19.885) 17.774,19.848 18.102,19.848 18.45,19.5 20.95,19.5 21.55,20.1 21.55,21.12 20.923,21.747 v1(20.923,22.788)
  L4 [BOTTOM] w0.203: v1(20.299,11.873) 20.356,11.93 20.356,12.031 20.8,12.475 C7.2@20.85,12.475
  L4 [BOTTOM] w0.381: 17.05,13.913 17.737,14.6 v1(17.737,19.885) ; C8.2@20.325,22.65 20.763,22.65 20.901,22.788 v1(20.923,22.788)
  L4 [BOTTOM] w0.508: C13.2@17.05,11.25 17.05,13.913
+1V2PLL: IC1.29 R6.2 | length 2.3
  L1 [TOP] w0.203: IC1.29@21.8,19.7 21.8,21.05
  L1 [TOP] w0.254: 21.8,21.05 21.8,21.091 22.055,21.346 22.055,21.854 R6.2@22.075,21.875
+1V8: C11.2 L4.2 TP15.1 U1.1 | length 0
+1V8f: C33.2 C34.2 IC7.3 IC7.24 IC7.29 IC7.32 L4.1 | length 7
  L1 [TOP] w0.203: v1(18.861,4.488) 18.962,4.589 IC7.24@18.962,5.097 ; IC7.29@21.604,4.462 21.608,4.458 21.608,3.644 v1(21.612,3.64) ; IC7.32@23.103,4.462 23.103,4.208 23.461,3.85 v1(23.85,3.85) ; v1@24.738,6.088 v1(24.75,6.1)
  L1 [TOP] w0.254: IC7.3@23.738,6.088 v1@24.738,6.088
  L4 [BOTTOM] w0.381: v1(26.55,4.948) C33.2@26.55,4.475 C34.2@27.75,4.475 27.81,4.416 28.201,4.416 28.317,4.299 29.001,4.299 L4.1@29.25,4.05
+2V5: C9.2 D1.1 IC1.24 TP10.1 | length 5.6
  L1 [TOP] w0.254: TP10.1@24.2,21.05 25.125,21.05 ; IC1.24@24.5,19 24.796,19 25.175,19.379 25.175,21 25.125,21.05 ; D1.1@25.35,22.65 25.3,22.6 25.275,22.6 25.2,22.525 25.2,21.125 25.125,21.05 ; C9.2@25.575,21 25.525,21.05 25.125,21.05
+3V3: C1.2 C2.2 C3.2 C4.2 C5.2 C6.2 C10.2 C12.2 C14.2 C15.1 C16.1 C17.2 C35.1 C42.2 C43.2 C56.2 C57.2 C58.2 D1.2 F1.2 G1.1 G1.4 IC1.1 IC1.22 IC1.33 IC2.5 IC3.5 IC4.3 IC4.7 IC4.8 IC5.1 IC5.6 IC7.13 IC8.A9 LED2.2 R3.1 R9.1 R11.1 R12.1 R13.2 R14.1 R29.1 R30.1 TP1.1 U1.3 U1.4 U2.3 U2.4 | length 47.6
  L1 [TOP] w0.203: v1(19.796,20.543) 19.798,20.541 19.798,19.702 IC1.33@19.8,19.7 ; IC7.13@21.096,9.238 21.096,10.246 v1(21.1,10.25)
  L1 [TOP] w0.254: v1(18.211,11.909) 18.211,11.975 18.298,12.062 18.298,12.798 IC1.1@18.3,12.8 ; IC1.22@24.5,18 24.502,18.002 25.15,18.002 25.291,18.142 26.267,18.142 C2.2@26.35,18.225 ; v1(26.907,11.507) 26.911,11.504 27.471,11.504 C17.2@27.475,11.5 ; D1.2@27.05,22.65 D1.2@27.1,22.7 ; IC5.1@27.4,10.3 27.429,10.3 27.437,10.308 C17.2@27.437,11.462 ; C1.2@27.529,18.225 27.55,18.204 C1.2@27.56,18.215 ; v1@28.163,18.215 v1(28.174,18.204) ; IC5.6@30.27,9.3 30.278,9.292 30.997,9.292 31.167,9.123 v1(31.233,9.123)
  L1 [TOP] w0.381: v1(12.5,23) 12.515,22.985 12.565,22.985 12.8,22.75 C56.2@12.8,22.075 13.475,22.075 ; G1.4@14.3,22.9 G1.4@14.3,22.95 ; C2.2@26.371,18.225 C1.2@27.529,18.225 ; C1.2@27.56,18.215 v1@28.163,18.215 ; v1(31.406,19.295) 31.41,19.3 31.41,20.808 IC4.3@31.415,20.812 ; IC4.7@32.685,15.388 32.685,16.635 32.7,16.65 v1(32.7,16.7) ; R13.2@33.775,22.9 33.787,22.887 33.787,22.071 v1(33.8,22.059) ; v1(33.95,12.85) 34,12.9 34,13.425 C16.1@33.975,13.45 33.965,13.46 33.965,15.378 IC4.8@33.955,15.388 ; R14.1@37.075,22.9 37.1,22.875 v1(37.1,21.924) ; v1(37.85,14.6) 37.875,14.625 R9.1@38.9,14.625 ; IC8.A9@56.8,19 58.775,19 C35.1@58.8,19.025 59.575,19.025 v1(59.6,19.05)
  L1 [TOP] w0.508: LED2.2@4.59,17.89 LED2.2@4.6,17.9 ; TP1.1@7.625,6.125 7.631,6.131 8.531,6.131 v1(8.65,6.25) ; 13.475,22.075 14.3,22.9 G1.1@14.3,21.05 ; G1.4@14.3,22.95 14.325,22.975 v1(15.1,22.975) ; D1.2@27.1,22.7 v1(27.7,22.7)
  L1 [TOP] w0.762: v1(4.59,16.817) LED2.2@4.59,17.89
  L4 [BOTTOM] w0.203: C12.2@13.75,11.275 13.783,11.308 13.783,11.992 v1(13.817,12.025) ; v1(14.824,9.945) 14.824,10.026 14.826,10.026 14.876,10.076 14.876,10.077 14.95,10.152 14.95,10.394 U2.3@14.968,10.412 ; U2.3@14.932,10.447 14.935,10.45 U2.3@14.95,10.45 ; C42.2@20.5,9.725 20.55,9.725 20.698,9.873 C42.2@20.698,9.923 ; v1@20.976,10.201 v1@21.1,10.201 ; v1(21.1,10.25) v1@21.151,10.25 ; C43.2@21.527,9.873 21.602,9.873 C43.2@21.75,9.725
  L4 [BOTTOM] w0.254: R11.1@11.7,21.85 11.75,21.85 11.873,21.973 11.873,22.023 12.498,22.648 ; 12.499,22.676 13.127,22.048 13.127,21.998 13.248,21.877 R12.1@13.298,21.877 ; 12.5,22.727 v1(12.5,23) ; v1(12.6,14.9) 12.675,14.975 C15.1@12.675,15.6 12.748,15.673 12.748,16.16 12.877,16.289 12.877,16.639 IC3.5@12.9,16.662 ; R12.1@13.181,21.995 R12.1@13.298,21.877 ; R12.1@13.3,21.875 R12.1@13.298,21.877 ; R3.1@24.725,12.55 v1(25.5,12.55) ; U1.4@32.076,6.721 32.231,6.721 32.725,7.216 v1@32.725,7.535 ; U1.3@32.076,7.371 32.237,7.532 32.573,7.532 32.633,7.593 v1(32.7,7.593) ; v1(45.375,17.85) R30.1@45.9,17.85 ; v1(49.09,17.116) 49.129,17.155 49.129,17.289 49.147,17.307 49.147,17.847 R29.1@49.15,17.85
  L4 [BOTTOM] w0.381: v1(18.211,11.909) 18.211,11.941 18.34,12.07 18.34,12.415 18.4,12.475 C3.2@18.45,12.475 ; C6.2@18.618,19.875 C5.2@19.8,19.875 19.802,19.877 19.802,20.537 v1(19.796,20.543) ; C42.2@20.698,9.923 v1@20.976,10.201 ; v1@21.151,10.25 C43.2@21.527,9.873 ; v1(46.8,11.8) 47.425,11.8 C14.2@47.45,11.775 IC2.5@47.45,13.5
  L4 [BOTTOM] w0.508: C57.2@15.1,22.075 v1(15.1,22.975) ; C3.2@18.45,12.475 C4.2@19.65,12.475
  other v1: 6.9,16.2 7.95,16.2 9,16.2 10,16.2
+3V3_IN: F1.1 P1.1 | length 0.6
  L4 [BOTTOM] w0.185: P1.1@7.982,24.792 P1.1@8.415,25.225
+5V: C32.1 C36.2 C59.2 F2.2 IC8.A6 IC8.F4 K3.1 L5.2 L6.1 TP7.1 | length 7.7
  L1 [TOP] w0.381: TP7.1@7.65,3.25 7.7,3.3 v1(7.7,4.15) ; v1(50.15,16.9) 50.175,16.875 C36.2@50.95,16.875 ; C36.2@50.947,16.875 53.925,16.875 IC8.F4@54.3,16.5 ; v1(55.229,21.38) 55.227,21.378 55.227,20.652 C32.1@55.225,20.65 55.225,19.075 IC8.A6@55.3,19
  other v1: 34.448,0.839 43.345,0.889 34.444,1.669 43.352,1.848 1.75,16.25 2.75,16.25 1.75,17.25 2.75,17.25
+5V_IN: F2.1 P1.2 P1.4
  other v1: 3.95,22.95 4.95,22.95
+HV: C44.2 C45.2 IC8.P6 K3.2 | length 11.5
  L1 [TOP] w0.185: v1(55.25,11.432) 55.297,11.479 55.297,12.497 IC8.P6@55.3,12.5
  L4 [BOTTOM] w0.762: C44.2@55.25,9.548 v1(55.25,11.432)
  L4 [BOTTOM] w1.016: C45.2@52.65,9.548 55.25,9.548 55.274,9.524 57.726,9.524 57.75,9.5 58.817,9.5 60.36,7.957 K3.2@60.36,7.95 ; K3.2@60.255,7.845 K3.2@60.35,7.75
-HV: C54.1 C55.1 IC8.P9 K4.2 | length 10.6
  L1 [TOP] w0.185: IC8.P9@56.8,12.5 57.182,12.118 57.182,11.709 v1(57.242,11.648)
  L4 [BOTTOM] w0.762: v1(57.242,11.648) 57.13,11.761 57.13,12.071 57.559,12.5 57.75,12.5
  L4 [BOTTOM] w1.016: C55.1@52.7,13.3 C54.1@55.2,13.3 56.33,13.3 57.13,12.5 57.559,12.5 ; 57.75,12.5 59.16,12.5 K4.2@60.36,11.3
ADC_CLK: IC1.37 IC7.1 TP23.1 | length 28.7
  L1 [TOP] w0.185: IC7.1@23.785,5.1 23.788,5.103 24.716,5.103 v1(24.719,5.106)
  L1 [TOP] w0.203: v1(13.192,7.894) 13.146,7.939 13.146,15.086 13.154,15.094 13.154,17.178 TP23.1@13.131,17.2 13.131,17.206 14.672,18.747 15.56,18.747 15.93,19.117 16.578,19.117 16.748,18.947 17.247,18.947 17.277,18.977 17.577,18.977 IC1.37@17.6,19
  L4 [BOTTOM] w0.203: v1(13.192,7.894) 13.156,7.894 13.124,7.861 14.889,7.861 15.75,7 17.55,7 19.7,4.85 22.041,4.85 22.297,5.106 v1(24.719,5.106)
ADC_CS: IC7.4 TP31.1 | length 4.3
  L1 [TOP] w0.185: IC7.4@23.738,6.596 24.539,6.596 24.543,6.6 24.957,6.6 24.961,6.596 26.646,6.596 26.842,6.4 TP31.1@28,6.4
ADC_SCLK: IC7.5 TP30.1 | length 3.4
  L1 [TOP] w0.185: IC7.5@23.738,7.104 26.104,7.104 26.332,7.332 26.832,7.332 TP30.1@26.95,7.45
ADC_SDIO: IC7.6 TP29.1 | length 1.6
  L1 [TOP] w0.185: IC7.6@23.738,7.612 24.5,7.612 24.988,8.1 TP29.1@25.1,8.1
BT_TRIG: IC1.31 P1.8 R21.2 | length 31.3
  L1 [TOP] w0.203: R21.2@10.4,8.925 v1(10.4,9.7) ; P1.8@16.035,27.765 16.035,27.665 17.15,26.55 19.4,26.55 19.8,26.15 19.8,22.9 20.331,22.369 20.331,21.462 20.732,21.06 v1(20.732,21.038) 20.777,20.994 20.777,19.723 IC1.31@20.8,19.7
  L4 [BOTTOM] w0.203: v1(10.4,9.7) 10.4,11.9 11.675,13.175 14.875,13.175 16.925,15.225 16.925,20.054 17.959,21.087 19.974,21.087 20.024,21.038 v1(20.732,21.038)
BT_USER: IC1.38 P1.10 R26.2 | length 21.7
  L1 [TOP] w0.185: v1@10.4,14.25 v1(10.4,14.3)
  L1 [TOP] w0.203: R26.2@10.4,13.275 v1@10.4,14.25 ; v1(16.319,18.613) 16.399,18.613 16.512,18.5 IC1.38@17.6,18.5
  L4 [BOTTOM] w0.203: v1(10.4,14.3) 14.7,14.3 15.208,14.808 15.208,17.52 15.715,18.027 15.715,18.062 16.266,18.613 v1(16.319,18.613) ; v1@16.292,18.64 16.365,18.712 16.365,19.323 16.467,19.424 16.467,22.767 17.2,23.5 17.2,26.39 P1.10@18.575,27.765
D2: IC1.10 IC7.11 | length 3.8
  L1 [TOP] w0.203: IC7.11@22.112,9.238 22.112,10.062 22.8,10.75 IC1.10@22.8,12.8
D3: IC1.9 IC7.12 | length 3.9
  L1 [TOP] w0.203: IC7.12@21.604,9.238 21.604,10.454 22.3,11.15 22.3,11.509 22.3,11.923 ; 22.3,11.923 IC1.9@22.3,12.8
D4: IC1.6 IC7.14 | length 3.7
  L1 [TOP] w0.203: IC7.14@20.588,9.238 20.588,10.453 20.588,11.394 20.803,11.608 20.803,12.082 20.8,12.084 IC1.6@20.8,12.8
D5: IC1.4 IC7.15 | length 3.8
  L1 [TOP] w0.203: IC1.4@19.8,12.8 19.8,12.113 19.712,12.026 19.712,11.238 20.105,10.845 IC7.15@20.105,9.238
D6: IC1.3 IC7.16 | length 3.7
  L1 [TOP] w0.203: IC1.3@19.3,12.8 19.3,10.85 19.597,10.553 19.597,10.053 IC7.16@19.597,9.238
D7: IC1.2 IC7.17 | length 4.3
  L1 [TOP] w0.203: IC1.2@18.8,12.8 18.8,12.157 18.8,11.743 18.8,9.95 18.962,9.788 18.962,9.538 IC7.17@18.962,8.603
D8: IC1.48 IC7.18 | length 6.4
  L1 [TOP] w0.203: IC1.48@17.6,13.5 17.6,8.8 18.305,8.095 IC7.18@18.962,8.095
D9: IC1.47 IC7.19 | length 8.3
  L1 [TOP] w0.203: IC1.47@17.6,14 17.567,13.967 17.031,13.967 16.883,13.819 16.883,8.867 18.138,7.612 IC7.19@18.962,7.612
D10: IC1.46 IC7.20 | length 10.2
  L1 [TOP] w0.203: IC1.46@17.6,14.5 16.8,14.5 16.341,14.041 16.341,8.459 17.696,7.104 IC7.20@18.962,7.104
D11: IC1.45 IC7.21 | length 12.7
  L1 [TOP] w0.203: IC1.45@17.6,15 16.15,15 15.334,14.184 15.334,8.566 17.304,6.596 IC7.21@18.962,6.596
DAC_CS: IC1.13 IC5.2 TP4.1 | length 5.5
  L1 [TOP] w0.203: IC1.13@24.5,13.5 24.5,12.5 24.875,12.125 25.225,12.125 TP4.1@25.8,11.55 26.296,11.054 26.296,10.204 26.7,9.8 IC5.2@27.4,9.8
dac_g: C41.2 IC5.8 IC6.15 TP5.1 | length 9.8
  L1 [TOP] w0.185: IC5.8@30.27,10.3 30.555,10.3 30.672,10.417 30.672,10.475 30.935,10.738 32.746,10.738 33.183,10.3 TP5.1@33.35,10.3 35,10.3 35.625,10.3
  L1 [TOP] w0.203: 35.625,10.3 35.8,10.475 38.175,10.475 38.75,9.9 38.75,9.343 IC6.15@38.755,9.338
DAC_MOSI: IC1.11 IC5.4 TP2.1 | length 6.9
  L1 [TOP] w0.203: IC1.11@23.3,12.8 23.3,10.897 23.65,10.547 TP2.1@23.65,10.45 25.298,8.802 25.391,8.802 25.392,8.8 IC5.4@27.4,8.8
DAC_SCLK: IC1.12 IC5.3 TP3.1 | length 5.6
  L1 [TOP] w0.203: IC1.12@23.8,12.8 23.8,11.85 26.35,9.3 IC5.3@27.4,9.3
DCLK: IC1.44 IC7.22 | length 15.2
  L1 [TOP] w0.203: IC1.44@17.6,15.5 15.9,15.5 14.32,13.92 14.32,8.13 14.85,7.6 16.36,6.09 IC7.22@18.96,6.09
DONE: IC1.7 P1.16 R4.1 | length 41.9
  L1 [TOP] w0.185: v1(21.125,11.12) 21.125,11.205 21.3,11.38 IC1.7@21.3,12.8
  L1 [TOP] w0.203: P1.16@26.195,27.765 26.447,27.513 26.447,26.696 27.5,25.642 27.5,24.5 28.75,23.25 28.75,12.8 v1(28.735,12.785) ; v1(37.25,18.1) 37.25,19.55 38.025,20.325 R4.1@38.9,20.325
  L4 [BOTTOM] w0.203: v1(21.125,11.12) 21.602,10.644 24.994,10.644 27.135,12.785 v1(28.735,12.785) 29.521,12 30.95,12 34.6,15.65 34.6,16.75 35.95,18.1 v1(37.25,18.1)
EA_CLK: IC1.36 P1.29 | length 37.5
  L1 [TOP] w0.185: v1(19.85,28.6) 20.5,29.25 41.87,29.25 42.65,28.47 42.65,26.55 P1.29@43.975,25.225
  L1 [TOP] w0.203: v1(17.359,21.833) 18.3,20.893 IC1.36@18.3,19.7
  L4 [BOTTOM] w0.203: v1(17.359,21.833) 17.359,21.903 17.768,22.312 17.768,22.829 19.85,24.911 v1(19.85,28.6)
F_CS: IC1.16 IC4.1 P1.26 R13.1 | length 24.8
  L1 [TOP] w0.203: IC1.16@24.5,15 25.761,15 25.832,14.929 26.299,14.929 v1(26.35,14.879) ; v1(33.95,19.1) 33.95,20.807 IC4.1@33.955,20.812 ; IC4.1@33.955,20.812 34.63,20.813 34.825,21.007 R13.1@34.825,22.9 34.825,23.83 35.15,24.155 35.15,26.15 35.55,26.55 37.68,26.55 P1.26@38.895,27.765
  L4 [BOTTOM] w0.203: v1(26.35,14.879) 31.694,14.879 33.947,17.132 33.947,19.097 v1(33.95,19.1)